# EAGLE board STM32-PROX (EAGLE 6.5.0), part 1 of 2
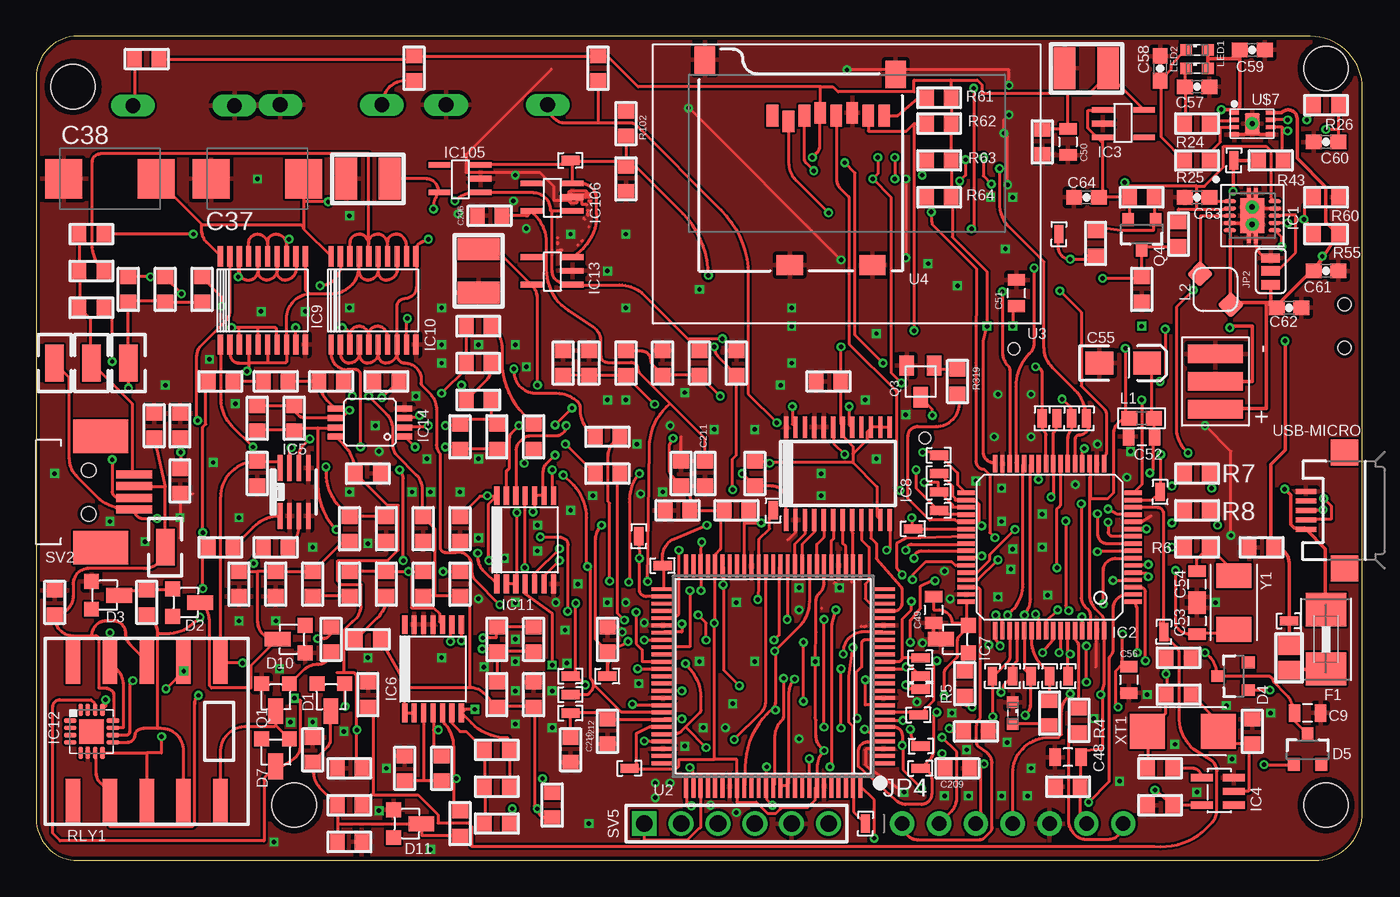
[diagram p0: board, top side]
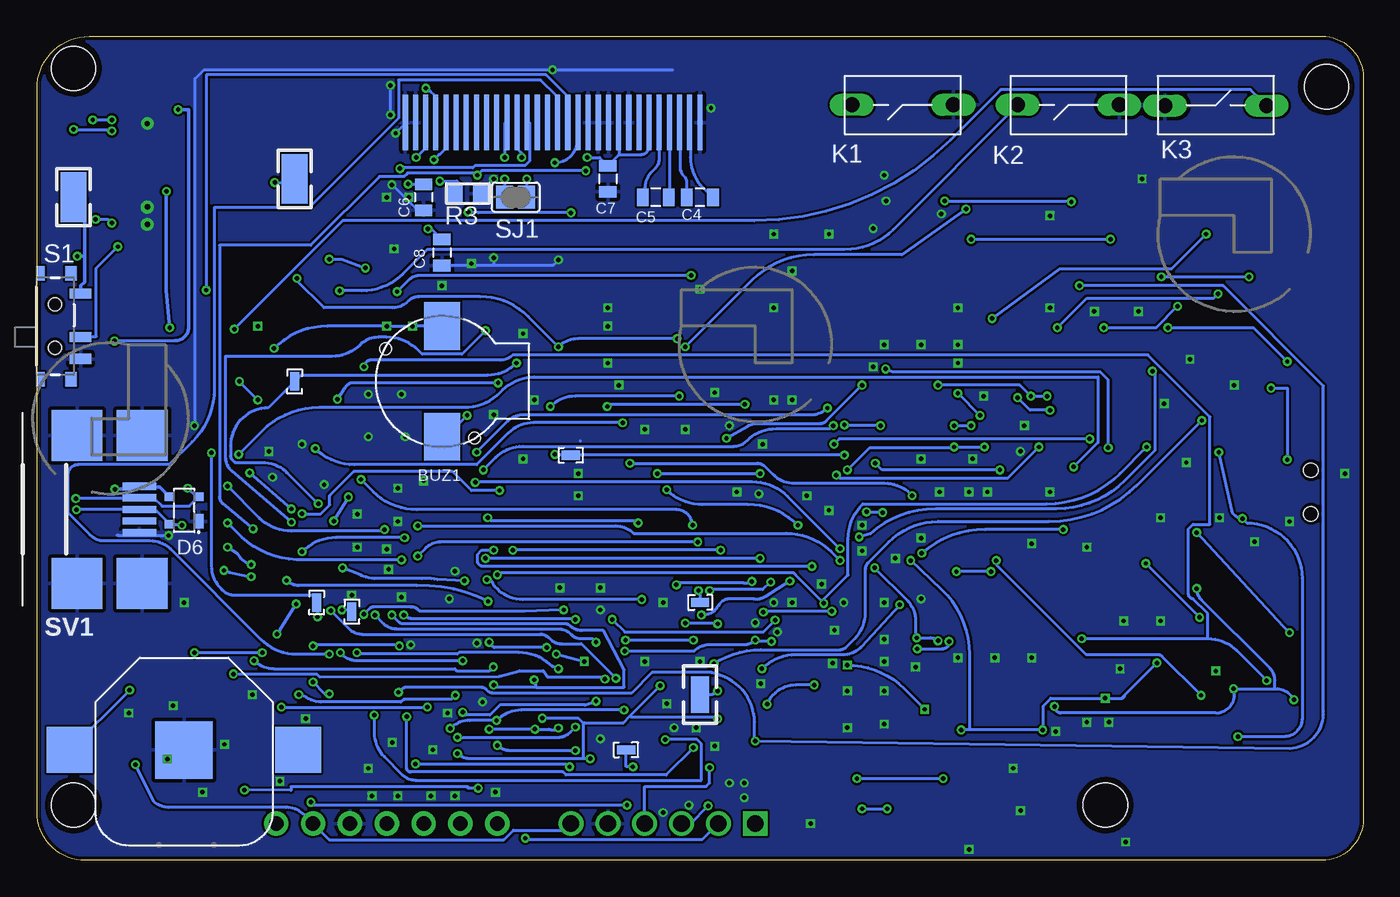
[diagram p1: board, bottom side, seen from below]

Size 91.42 x 56.82 mm. Coordinates in mm from the lower left corner, seen from the top.
Outline: 91.42,3.34 91.42,53.22 arc90 87.81,56.82 2.84,56.82 arc90 0,53.98 0,2.85 arc90 2.85,0 88.08,0 arc90 91.42,3.34
Copper layers (1*16): Top 0.035mm / dielectric 1.5mm / Bottom 0.035mm
Design rules "ITEADstudio_DRC": minimum track width 6mil, minimum drill 12mil, track to track 6mil, track to pad 6mil, pad to pad 6mil, via to via 6mil, smd to smd 0mil, copper to edge 10mil, drill to drill 10mil, minimum pad ring 10mil, minimum via ring 6mil, stop-mask expansion 2mil, vias tented up to drill 100mil, thermal gap 10mil
Net classes: 0 default: width 0.203 mm; 1 adc: width 0.203 mm; 2 power: width 0.254 mm, drill 0.254 mm, clearance 0.203 mm

## Footprints (pad centres in the part's own frame; a part is rotated, then mirrored left to right if it is on the bottom)
NSL_SPARKFUN_BATTCON_12MM = smd 3.962 x 3.962: GND 0,0 | smd 3.175 x 3.175: PWR@1 -7.874,0; PWR@2 7.874,0
BUZZER = smd 3.3 x 2.5: 1 3.81,0; 2 -3.81,0 | hole 0.8: -3.897,-2.25; 2.25,3.897
RLC_0603 = smd 1 x 1.1: 1 -0.85,0; 2 0.85,0
0805 = smd 0.8 x 1.2: 1 -0.9,0; 2 0.9,0
RLC_1210 = smd 1.5 x 2.9: 1 -1.5,0; 2 1.5,0
D/7343-31R = smd 2.55 x 2.7: + 3.175,0; - -3.175,0
EIA3216-KIT = smd 1.9 x 1.6: A 1.65,0; C -1.65,0
SPARKFUN_0603-CAP = smd 1.1 x 1: 1 -0.85,0; 2 0.85,0
SOT23-3LEAD = smd 1.016 x 1.016: 1 -0.94,-0.762; 2 0.965,-0.762 | smd 1.016 x 1.778: 3 0.013,1.143
SOT23-3 = smd 0.8 x 0.9: 1 -0.95,-1; 2 0.95,-1; 3 0,1.1
USBUG_SOT143B = smd 1 x 0.7: 1 -0.75,-1 | smd 0.6 x 0.7: 2 0.95,-1; 3 0.95,1; 4 -0.95,1
1812 = smd 2.286 x 2.794: 1 -2.046,0; 2 2.046,0
QFN-10 = smd 0.28 x 0.85: 1 -1,-1.545; 2 -0.5,-1.545; 3 0,-1.545; 4 0.5,-1.545; 5 1,-1.545; 6 1,1.545; 7 0.5,1.545; 8 0,1.545; 9 -0.5,1.545; 10 -1,1.545 | smd 2.4 x 1.65: P0 0,0 | smd 0.7 x 0.28: P1 -1.55,-0.25; P2 1.55,-0.25; P3 1.55,0.25; P4 -1.55,0.25 | drill 0.381: V0 -0.6,0; V1 0.6,0
LQFP64A_PACKAGE = smd 1.2 x 0.3: 1 -5.75,3.75; 2 -5.75,3.25; 3 -5.75,2.75; 4 -5.75,2.25; 5 -5.75,1.75; 6 -5.75,1.25; 7 -5.75,0.75; 8 -5.75,0.25; 9 -5.75,-0.25; 10 -5.75,-0.75; 11 -5.75,-1.25; 12 -5.75,-1.75; 13 -5.75,-2.25; 14 -5.75,-2.75; 15 -5.75,-3.25; 16 -5.75,-3.75; 33 5.75,-3.75; 34 5.75,-3.25; 35 5.75,-2.75; 36 5.75,-2.25; 37 5.75,-1.75; 38 5.75,-1.25; 39 5.75,-0.75; 40 5.75,-0.25; 41 5.75,0.25; 42 5.75,0.75; 43 5.75,1.25; 44 5.75,1.75; 45 5.75,2.25; 46 5.75,2.75; 47 5.75,3.25; 48 5.75,3.75 | smd 0.3 x 1.2: 17 -3.75,-5.75; 18 -3.25,-5.75; 19 -2.75,-5.75; 20 -2.25,-5.75; 21 -1.75,-5.75; 22 -1.25,-5.75; 23 -0.75,-5.75; 24 -0.25,-5.75; 25 0.25,-5.75; 26 0.75,-5.75; 27 1.25,-5.75; 28 1.75,-5.75; 29 2.25,-5.75; 30 2.75,-5.75; 31 3.25,-5.75; 32 3.75,-5.75; 49 3.75,5.75; 50 3.25,5.75; 51 2.75,5.75; 52 2.25,5.75; 53 1.75,5.75; 54 1.25,5.75; 55 0.75,5.75; 56 0.25,5.75; 57 -0.25,5.75; 58 -0.75,5.75; 59 -1.25,5.75; 60 -1.75,5.75; 61 -2.25,5.75; 62 -2.75,5.75; 63 -3.25,5.75; 64 -3.75,5.75
SOT-23-5 = smd 0.4 x 1.5: 1 -0.94,-1.422; 2 0.01,-1.422; 3 0.96,-1.422; 4 0.96,1.428; 5 -0.94,1.428
SMV-5 = smd 1.5 x 0.5: 1 0,0; 2 0,-0.95; 3 0,-1.9; 4 2.2,-1.9; 5 2.2,0
SOT-23-8-OR-MSOP-8 = smd 0.325 x 1.8: 1 -0.975,-1.65; 2 -0.325,-1.65; 3 0.325,-1.65; 4 0.975,-1.65; 5 0.975,1.65; 6 0.325,1.65; 7 -0.325,1.65; 8 -0.975,1.65
TSSOP-14 = smd 1.3 x 0.36: 1 0,0; 2 0,-0.65; 3 0,-1.3; 4 0,-1.95; 5 0,-2.6; 6 0,-3.25; 7 0,-3.9; 8 6.095,-3.9; 9 6.095,-3.25; 10 6.095,-2.6; 11 6.095,-1.95; 12 6.095,-1.3; 13 6.095,-0.65; 14 6.095,0
TSSOP-24 = smd 0.3 x 1.5: 1 -2.925,-3.2; 2 -2.275,-3.2; 3 -1.625,-3.2; 4 -0.975,-3.2; 5 -0.325,-3.2; 6 0.325,-3.2; 7 0.975,-3.2; 8 1.625,-3.2; 9 2.275,-3.2; 10 2.925,-3.2; 11 3.575,-3.2; 12 4.225,-3.2; 13 4.225,3.2; 14 3.575,3.2; 15 2.925,3.2; 16 2.275,3.2; 17 1.625,3.2; 18 0.975,3.2; 19 0.325,3.2; 20 -0.325,3.2; 21 -0.975,3.2; 22 -1.625,3.2; 23 -2.275,3.2; 24 -2.925,3.2
TSSOP-20 = smd 1.4 x 0.36: 1 0,0; 2 0,-0.65; 3 0,-1.3; 4 0,-1.95; 5 0,-2.6; 6 0,-3.25; 7 0,-3.9; 8 0,-4.55; 9 0,-5.2; 10 0,-5.85; 11 6.095,-5.85; 12 6.095,-5.2; 13 6.095,-4.55; 14 6.095,-3.9; 15 6.095,-3.25; 16 6.095,-2.6; 17 6.095,-1.95; 18 6.095,-1.3; 19 6.095,-0.65; 20 6.095,0
QFN16 = smd 0.85 x 0.3: 1 -1.475,0.75; 2 -1.475,0.25; 3 -1.475,-0.25; 4 -1.475,-0.75; 9 1.475,-0.75; 10 1.475,-0.25; 11 1.475,0.25; 12 1.475,0.75 | smd 0.3 x 0.85: 5 -0.75,-1.475; 6 -0.25,-1.475; 7 0.25,-1.475; 8 0.75,-1.475; 13 0.75,1.475; 14 0.25,1.475; 15 -0.25,1.475; 16 -0.75,1.475 | smd 1.7 x 1.7: TH 0,0
MSOP8 = smd 0.41 x 1.02: 1 0,0; 2 0.65,0; 3 1.3,0; 4 1.95,0; 5 1.95,4.8; 6 1.3,4.8; 7 0.65,4.8; 8 0,4.8
SJ_3 = smd 0.635 x 1.27: 1 -0.889,0; 2 0,0; 3 0.965,0
1X07_ROUND = drill 1 pad 1.676: 1 -7.62,0; 2 -5.08,0; 3 -2.54,0; 4 0,0; 5 2.54,0; 6 5.08,0; 7 7.62,0
B3F-5XX = drill 1.016 long: 1 -3.501,-0.029; 2 3.501,-0.029
0603 = smd 1.1 x 1: 1 -0.85,0; 2 0.85,0
CDRH2D18 = smd 1.3 x 1.3 rotated 225: P$1 -1.061,1.061 | smd 1.3 x 1.3 rotated 315: P$2 1.061,-1.061
LED_SML0603 = smd 0.8 x 0.8: A 0.75,0; C -0.75,0
SOT-23-3 = smd 1 x 1.4: 1 -0.95,-1.1; 2 0.95,-1.1; 3 0,1.1
TQ-SMD-RELAY = smd 1 x 3: 1 -5.08,-4.78; 2 -2.54,-4.78; 3 0,-4.78; 4 2.54,-4.78; 5 5.08,-4.78; 6 5.08,4.78; 7 2.54,4.78; 8 0,4.78; 9 -2.54,4.78; 10 -5.08,4.78
SWITCH-SPST-SMD-A = smd 0.7 x 1.5: 1 -2.25,-1.75; 2 -0.75,-1.75; 3 2.25,-1.75 | smd 1 x 0.6: GND1 -3.65,1; GND3 3.65,1 | smd 1 x 0.8: GND2 -3.65,-1.1; GND4 3.65,-1.1 | hole 0.9: -1.5,0; 1.5,0
SOLDERJUMPER_REFLOW = smd 1.168 x 1.6: 1 -0.762,0; 2 0.762,0
USB-MINIB-SMD = smd 2.3 x 0.5: 1 2,0.4; 2 2,-0.4; 3 2,-1.2; 4 2,-2; 5 2,-2.8 | smd 3.5 x 3.5: TAB0 -2.3,3.9; TAB1 2.2,3.9; TAB2 2.2,-6.3; TAB3 -2.3,-6.3
HIROSE-MQ172-4POS = smd 0.55 x 2.5: 1 -1.2,6.75; 2 -0.4,6.75; 3 0.4,6.75; 4 1.2,6.75 | smd 2.3 x 3.8: P$1 -3.85,4.45; P$2 3.85,4.45 | hole 1: -1.5,3.6; 1.5,3.6
HEADER-MALE-6X1-0.100-UNKEYED = drill 1.143 square: 1 0,6.35 | drill 1.143: 2 0,3.81; 3 0,1.27; 4 0,-1.27; 5 0,-3.81; 6 0,-6.35
SMD-TESTPOINT = smd 1.27 x 0.635: 1 0,0
KEYSTONE-SMD-TESTPOINT-5015 = smd 2.54 x 1.27: 1 0,0
--MERGED_KEYSTONE-SMD-TESTPOINT-5015 = smd 3.429 x 1.778: 1 0,0
RLC_0805 = smd 1.3 x 1.5: 1 -0.85,0; 2 0.85,0
VQ100 = smd 0.27 x 1.6: 1 -6,-7.6; 2 -5.5,-7.6; 3 -5,-7.6; 4 -4.5,-7.6; 5 -4,-7.6; 6 -3.5,-7.6; 7 -3,-7.6; 8 -2.5,-7.6; 9 -2,-7.6; 10 -1.5,-7.6; 11 -1,-7.6; 12 -0.5,-7.6; 13 0,-7.6; 14 0.5,-7.6; 15 1,-7.6; 16 1.5,-7.6; 17 2,-7.6; 18 2.5,-7.6; 19 3,-7.6; 20 3.5,-7.6; 21 4,-7.6; 22 4.5,-7.6; 23 5,-7.6; 24 5.5,-7.6; 25 6,-7.6; 51 6,7.6; 52 5.5,7.6; 53 5,7.6; 54 4.5,7.6; 55 4,7.6; 56 3.5,7.6; 57 3,7.6; 58 2.5,7.6; 59 2,7.6; 60 1.5,7.6; 61 1,7.6; 62 0.5,7.6; 63 0,7.6; 64 -0.5,7.6; 65 -1,7.6; 66 -1.5,7.6; 67 -2,7.6; 68 -2.5,7.6; 69 -3,7.6; 70 -3.5,7.6; 71 -4,7.6; 72 -4.5,7.6; 73 -5,7.6; 74 -5.5,7.6; 75 -6,7.6 | smd 1.6 x 0.27: 26 7.6,-6; 27 7.6,-5.5; 28 7.6,-5; 29 7.6,-4.5; 30 7.6,-4; 31 7.6,-3.5; 32 7.6,-3; 33 7.6,-2.5; 34 7.6,-2; 35 7.6,-1.5; 36 7.6,-1; 37 7.6,-0.5; 38 7.6,0; 39 7.6,0.5; 40 7.6,1; 41 7.6,1.5; 42 7.6,2; 43 7.6,2.5; 44 7.6,3; 45 7.6,3.5; 46 7.6,4; 47 7.6,4.5; 48 7.6,5; 49 7.6,5.5; 50 7.6,6; 76 -7.6,6; 77 -7.6,5.5; 78 -7.6,5; 79 -7.6,4.5; 80 -7.6,4; 81 -7.6,3.5; 82 -7.6,3; 83 -7.6,2.5; 84 -7.6,2; 85 -7.6,1.5; 86 -7.6,1; 87 -7.6,0.5; 88 -7.6,0; 89 -7.6,-0.5; 90 -7.6,-1; 91 -7.6,-1.5; 92 -7.6,-2; 93 -7.6,-2.5; 94 -7.6,-3; 95 -7.6,-3.5; 96 -7.6,-4; 97 -7.6,-4.5; 98 -7.6,-5; 99 -7.6,-5.5; 100 -7.6,-6
MICROBUILDER_UG-2864HSWEG01_0.96IN_WRAPAROUND = smd 0.35 x 3.81 bottom: 1 -10.15,8.96; 2 -9.45,8.96; 3 -8.75,8.96; 4 -8.05,8.96; 5 -7.35,8.96; 6 -6.65,8.96; 7 -5.95,8.96; 8 -5.25,8.96; 9 -4.55,8.96; 10 -3.85,8.96; 11 -3.15,8.96; 12 -2.45,8.96; 13 -1.75,8.96; 14 -1.05,8.96; 15 -0.35,8.96; 16 0.35,8.96; 17 1.05,8.96; 18 1.75,8.96; 19 2.45,8.96; 20 3.15,8.96; 21 3.85,8.96; 22 4.55,8.96; 23 5.25,8.96; 24 5.95,8.96; 25 6.65,8.96; 26 7.35,8.96; 27 8.05,8.96; 28 8.75,8.96; 29 9.45,8.96; 30 10.15,8.96
MICRO-SD-SOCKET-PP = smd 0.8 x 1.5: 1 -8.94,10.7; 2 -7.84,10.3; 3 -6.74,10.7; 4 -5.64,10.9; 5 -4.54,10.7; 6 -3.44,10.9; 7 -2.34,10.7; 8 -1.24,10.7 | smd 1.8 x 1.4: CD1 -2.05,0.4; CD2 -7.75,0.4 | smd 1.4 x 1.9: GND1 -13.6,14.55; GND3 -0.45,13.55
STAND-OFF-TIGHT = hole 3.048: 0,0
UDFN-EP = smd 0.3 x 0.65: 1 -0.75,-1.25; 2 -0.25,-1.25; 3 0.25,-1.25; 4 0.75,-1.25; 5 0.75,1.25; 6 0.25,1.25; 7 -0.25,1.25; 8 -0.75,1.25 | smd 1.45 x 1.05: 9 0,0 | drill 0.356: V1 0,0
BATT = smd 1.27 x 3.81: 1 -1.905,0; 2 0,0; 3 1.905,0
USB-MICROB = smd 0.35 x 1.4: D+ 0,2.65; D- -0.65,2.65; GND 1.3,2.65; ID 0.65,2.65; VBUS -1.3,2.65 | smd 1.8 x 1.9: MT1 -4,0; MT2 4,0
XTAL-SMD-CITIZEN-CS10 = smd 2.4 x 2.4: A -0.2,0; B 4.7,0
CRYSTAL-TXC-7A = smd 1.7 x 2.4: P$1 1.85,0; P$2 -1.85,0

## Placement (x,y rotation side)
BAT1  3V  [NSL_SPARKFUN_BATTCON_12MM]  81.28,7.62 0 bottom
BUZ1  BUZZER  [BUZZER]  63.5,33.02 90 bottom
C1  33nF  [RLC_0603]  84.45,21.59 180 top
C2  22pF  [RLC_0603]  83.82,8.89 90 top
C3  22pF  [RLC_0603]  78.74,13.97 0 top
C4  1uF  [0805]  45.72,45.72 180 bottom
C5  1uF  [0805]  48.77,45.72 180 bottom
C6  4.7uF  [0805]  64.77,45.72 270 bottom
C7  4.7uF  [0805]  52.07,46.99 270 bottom
C8  4.7uF  [0805]  63.5,41.91 270 bottom
C9  100nF  [0805]  87.63,10.16 180 top
C10  100nF  [RLC_0603]  34.29,11.43 90 top
C11  1nF  [RLC_0603]  21.59,1.27 0 top
C12  1nF  [RLC_0603]  29.21,2.54 90 top
C13  dnp  [RLC_0603]  31.75,5.08 0 top
C14  22pF  [RLC_0603]  7.62,17.78 90 top
C15  130pF  [RLC_0603]  13.97,19.05 270 top
C16  1nF  [RLC_0603]  21.59,19.05 90 top
C17  dnp  [RLC_0603]  34.29,15.24 90 top
C18  33nF  [RLC_0603]  38.1,34.29 90 top
C19  33nF  [RLC_0603]  43.18,34.29 90 top
C20  dnp  [RLC_0603]  8.13,29.97 90 top
C21  33nF  [RLC_0603]  21.59,6.35 180 top
C22  33nF  [RLC_0603]  22.86,26.67 0 top
C23  33nF  [RLC_0603]  15.24,26.67 270 top
C24  33nF  [RLC_0603]  29.21,22.86 270 top
C25  33nF  [RLC_0603]  71.12,5.08 180 top
C26  33nF  [RLC_0603]  69.34,49.53 270 top
C27  4.7uF  [RLC_1210]  72.39,54.61 180 top
C28  33nF  [RLC_0603]  44.2,24.13 180 top
C29  33nF  [RLC_0603]  39.37,15.24 90 top
C30  33nF  [RLC_0603]  64.77,8.89 0 top
C31  33nF  [RLC_0603]  48.26,34.29 90 top
C32  33nF  [RLC_0603]  44.45,26.67 90 top
C33  4.7uF  [RLC_1210]  22.86,46.99 180 top
C34  4.7uF  [RLC_1210]  30.48,40.64 270 top
C35  47pF  [RLC_0603]  9.91,29.97 90 top
C36  dnp  [RLC_0603]  9.91,26.16 270 top
C37  100uF  [D/7343-31R]  15.24,46.99 0 top
C38  100uF  [D/7343-31R]  5.08,46.99 0 top
C39  1nF  [RLC_0603]  1.27,17.78 90 top
C40  dnp  [RLC_0603]  31.75,29.21 270 top
C41  dnp  [RLC_0603]  17.78,30.48 270 top
C42  1nF  [RLC_0603]  34.29,29.21 90 top
C43  1nF  [RLC_0603]  12.7,33.02 0 top
C44  33nF  [RLC_0603]  54.61,33.02 180 top
C45  100nF  [RLC_0603]  26.67,22.86 270 top
C46  33nF  [RLC_0603]  76.2,39.37 270 top
C47  33nF  [RLC_0603]  77.47,3.81 180 top
C48  100nF  [0805]  71.12,7.11 180 top
C49  100nF  [0805]  61.85,17.27 270 top
C50  100nF  [0805]  71.12,49.53 270 top
C51  100nF  [0805]  67.56,39.12 90 top
C52  100nF  [0805]  76.2,29.21 180 top
C53  12pF  [0805]  80.01,16.51 270 top
C54  12pF  [0805]  80.01,19.05 90 top
C55  10uF  [EIA3216-KIT]  74.93,34.29 0 top
C56  100nF  [0805]  75.31,12.45 270 top
C57  100nF  [SPARKFUN_0603-CAP]  80.01,53.34 0 top
C58  100nF  [SPARKFUN_0603-CAP]  77.47,54.61 90 top
C59  1uF  [SPARKFUN_0603-CAP]  83.82,55.88 0 top
C60  100nF  [SPARKFUN_0603-CAP]  88.9,49.53 180 top
C61  1uF  [SPARKFUN_0603-CAP]  88.9,40.64 0 top
C62  10uF  [SPARKFUN_0603-CAP]  86.36,38.1 0 top
C63  100nF  [SPARKFUN_0603-CAP]  80.01,45.72 180 top
C64  10uF  [SPARKFUN_0603-CAP]  72.39,45.72 180 top
C206  4.7uF  [RLC_0603]  31.24,44.45 180 top
C209  100nF  [RLC_0603]  63.5,6.35 0 top
C210  100nF  [RLC_0603]  36.83,7.62 270 top
C211  100nF  [RLC_0603]  46.1,26.67 270 top
C212  100nF  [RLC_0603]  39.37,8.89 270 top
D1  DIODE-SMD-SOT23  [SOT23-3LEAD]  20.32,11.43 180 top
D2  DIODE-SMD-SOT23  [SOT23-3LEAD]  10.16,17.78 270 top
D3  DIODE-SMD-SOT23  [SOT23-3LEAD]  4.57,18.29 270 top
D4  PMEG4005ET  [SOT23-3]  82.55,12.7 90 top
D5  PMEG4005ET  [SOT23-3]  87.63,7.62 0 top
D6  USBUG_PRTR5V0U2X  [USBUG_SOT143B]  81.28,24.13 90 bottom
D7  DIODE-SMD-SOT23  [SOT23-3LEAD]  16.51,7.62 180 top
D10  DIODE-SMD-SOT23  [SOT23-3LEAD]  17.78,15.24 90 top
D11  DIODE-SMD-SOT23  [SOT23-3LEAD]  25.4,2.54 270 top
F1  [1812]  88.9,15.24 90 top
IC1  [QFN-10]  83.82,44.45 270 top
IC2  STM32F103RET6  [LQFP64A_PACKAGE]  69.85,21.59 180 top
IC3  PQ1X331M2ZP-3V3-LDO-SOT-23-5  [SOT-23-5]  74.93,50.8 270 top
IC4  HCU-INVERTER  [SMV-5]  82.55,3.81 180 top
IC5  TLV3502  [SOT-23-8-OR-MSOP-8]  17.78,25.4 0 top
IC6  MCP6294  [TSSOP-14]  25.4,10.16 90 top
IC7  MCP100  [SOT23-3LEAD]  63.5,15.24 90 top
IC8  TLC5540  [TSSOP-24]  54.61,26.67 0 top
IC9  74XX244  [TSSOP-20]  12.7,35.56 90 top
IC10  74XX244  [TSSOP-20]  20.32,35.56 90 top
IC11  CD4066  [TSSOP-14]  31.75,19.05 90 top
IC12  NLAST44599MNG  [QFN16]  3.81,8.89 0 top
IC13  PQ1X331M2ZP-3V3-LDO-SOT-23-5  [SOT-23-5]  35.56,40.64 90 top
IC14  AD8052  [MSOP8]  25.4,29.21 90 top
IC105  MCP1824T-250  [SOT-23-5]  29.21,46.99 90 top
IC106  MCP1824T-120  [SOT-23-5]  35.56,45.72 90 top
JP2  JUMPER-3SMD  [SJ_3]  85.09,40.64 270 top
JP4  [1X07_ROUND]  67.31,2.54 0 top
K1  [B3F-5XX]  31.75,52.07 180 bottom
K2  [B3F-5XX]  20.32,52.07 180 bottom
K3  [B3F-5XX]  10.16,52.07 0 bottom
L1  [0603]  76.2,30.48 0 top
L2  CDRH2D18/HPNP-2R2NC  [CDRH2D18]  81.28,39.37 180 top
LED1  [LED_SML0603]  80.01,55.88 0 top
LED2  [LED_SML0603]  80.01,54.61 0 top
LED3  [LED_SML0603]  67.31,10.16 270 top
Q1  NPN-SOT23-2N3904  [SOT23-3LEAD]  16.51,11.43 180 top
Q3  MMBT2222  [SOT-23-3]  60.96,33.02 180 top
Q4  MOSFET-PCHANNELSMD  [SOT23-3]  76.2,43.18 180 top
R1  1M  [RLC_0603]  78.74,11.43 180 top
R2  100  [RLC_0603]  77.47,6.35 180 top
R3  820K  [RLC_0603]  61.72,45.97 180 bottom
R4  10K  [RLC_0603]  71.88,9.65 90 top
R5  10K  [RLC_0603]  64.01,12.19 270 top
R6  390  [RLC_0603]  80.01,21.59 180 top
R7  27  [RLC_0603]  80.01,26.67 180 top
R8  27  [RLC_0603]  80.01,24.13 180 top
R9  100K  [RLC_0603]  27.94,6.35 90 top
R10  100K  [RLC_0603]  25.4,6.35 270 top
R11  510K  [RLC_0603]  19.05,7.62 270 top
R12  100K  [RLC_0603]  35.56,3.81 90 top
R13  10K  [RLC_0603]  31.75,2.54 180 top
R14  10K  [RLC_0603]  31.75,7.62 0 top
R15  10K  [RLC_0603]  16.51,19.05 90 top
R16  zerohm  [RLC_0603]  19.05,19.05 270 top
R17  10K  [RLC_0603]  26.67,19.05 90 top
R18  10K  [RLC_0603]  31.75,15.24 90 top
R19  10K  [RLC_0603]  31.75,11.43 90 top
R20  240K  [RLC_0603]  12.7,21.59 0 top
R21  24K  [RLC_0603]  16.51,21.59 0 top
R22  33  [RLC_0603]  3.81,38.1 180 top
R23  1K  [RLC_0603]  40.64,46.99 90 top
R24  [RLC_0603]  80.01,50.8 0 top
R25  [RLC_0603]  80.01,48.26 0 top
R26  215.9K  [RLC_0603]  88.9,52.07 0 top
R27  33  [RLC_0603]  6.35,39.37 270 top
R28  33  [RLC_0603]  3.81,40.64 180 top
R29  33  [RLC_0603]  8.89,39.37 270 top
R30  10M  [RLC_0603]  21.59,3.81 0 top
R31  240K  [RLC_0603]  22.86,11.43 270 top
R32  zerohm  [RLC_0603]  16.51,33.02 0 top
R33  2.4K  [RLC_0603]  29.21,29.21 270 top
R34  10K  [RLC_0603]  15.24,30.48 270 top
R35  zerohm  [RLC_0603]  30.48,36.83 180 top
R36  dnp  [RLC_0603]  29.21,19.05 90 top
R37  dnp  [RLC_0603]  24.13,19.05 90 top
R38  dnp  [RLC_0603]  22.86,15.24 180 top
R39  1K  [RLC_0603]  39.37,29.21 0 top
R40  10K  [RLC_0603]  20.32,15.24 270 top
R41  10M  [RLC_0603]  21.59,22.86 90 top
R42  1M  [RLC_0603]  24.13,22.86 90 top
R43  74.74K  [RLC_0603]  85.09,48.26 0 top
R44  1K  [RLC_0603]  39.37,26.67 0 top
R45  10K  [RLC_0603]  11.43,39.37 270 top
R46  10K  [RLC_0603]  3.81,43.18 180 top
R47  10K  [RLC_0603]  49.53,26.67 270 top
R48  dnp  [RLC_0603]  20.32,33.02 180 top
R49  2.4K  [RLC_0603]  30.48,34.29 180 top
R50  10K  [RLC_0603]  24.13,33.02 0 top
R51  2.4K  [RLC_0603]  30.48,31.75 0 top
R52  100  [RLC_0603]  45.72,34.29 90 top
R53  330  [RLC_0603]  40.64,34.29 90 top
R54  100  [RLC_0603]  36.32,34.29 270 top
R55  1.5M  [RLC_0603]  88.9,43.18 0 top
R56  10K  [RLC_0603]  76.2,45.72 180 top
R57  10K  [RLC_0603]  73.02,42.55 90 top
R58  dnp  [RLC_0603]  78.74,43.18 90 top
R59  3.3K  [RLC_0603]  48.26,24.13 180 top
R60  150K 1%  [RLC_0603]  88.9,45.72 180 top
R61  10K  [RLC_0603]  62.23,52.58 0 top
R62  10K  [RLC_0603]  62.23,50.8 0 top
R63  10K  [RLC_0603]  62.23,48.26 0 top
R64  10K  [RLC_0603]  62.23,45.72 0 top
R65  330  [RLC_0603]  69.85,10.16 270 top
R69  10K  [RLC_0603]  7.62,55.25 0 top
R70  10K  [RLC_0603]  26.03,54.61 90 top
R71  10K  [RLC_0603]  38.73,54.61 90 top
R102  10K  [RLC_0603]  40.64,50.8 90 top
R319  100  [RLC_0603]  63.5,33.02 270 top
RLY1  RELAY-DPDT  [TQ-SMD-RELAY]  7.62,8.89 180 top
S1  [SWITCH-SPST-SMD-A]  90.17,36.83 90 bottom
SJ1  [SOLDERJUMPER_REFLOW]  58.42,45.72 180 bottom
SV1  USB-MINIB  [USB-MINIB-SMD]  86.36,25.4 0 bottom
SV2  HIROSE-MQ172-4POS  [HIROSE-MQ172-4POS]  0,25.4 270 top
SV5  HEADER-MALE-6X1  [HEADER-MALE-6X1-0.100-UNKEYED]  48.26,2.54 90 top
TP1  TESTPAD  [SMD-TESTPOINT]  54.61,27.94 180 bottom
TP2  TESTPADKEYSTONE-SMD  [KEYSTONE-SMD-TESTPOINT-5015]  8.89,21.59 270 top
TP3  TESTPADKEYSTONE-SMD  [KEYSTONE-SMD-TESTPOINT-5015]  1.27,34.29 90 top
TP4  TESTPADKEYSTONE-SMD  [KEYSTONE-SMD-TESTPOINT-5015]  6.35,34.29 270 top
TP5  TESTPADKEYSTONE-SMD  [KEYSTONE-SMD-TESTPOINT-5015]  3.81,34.29 90 top
TP7  TESTPADKEYSTONE-SMD  [KEYSTONE-SMD-TESTPOINT-5015]  45.72,11.43 270 bottom
TP8  TESTPADKEYSTONE-SMD  [SMD-TESTPOINT]  86.36,16.51 180 top
TP9  TESTPADKEYSTONE-SMD  [--MERGED_KEYSTONE-SMD-TESTPOINT-5015]  88.9,45.72 90 bottom
TP10  TESTPADKEYSTONE-SMD  [--MERGED_KEYSTONE-SMD-TESTPOINT-5015]  73.66,46.99 90 bottom
TP11  TESTPAD  [SMD-TESTPOINT]  69.72,17.14 270 bottom
TP16  TESTPAD  [SMD-TESTPOINT]  82.55,48.26 90 top
TP18  TESTPAD  [SMD-TESTPOINT]  40.89,6.35 180 top
TP19  TESTPAD  [SMD-TESTPOINT]  39.37,12.7 180 top
TP20  TESTPAD  [SMD-TESTPOINT]  36.83,10.16 180 top
TP22  TESTPAD  [SMD-TESTPOINT]  36.83,48.26 180 top
TP23  TESTPAD  [SMD-TESTPOINT]  70.48,43.18 90 top
TP24  TESTPAD  [SMD-TESTPOINT]  57.15,2.54 270 top
TP25  TESTPAD  [SMD-TESTPOINT]  41.53,22.35 270 top
TP26  TESTPAD  [SMD-TESTPOINT]  45.72,17.78 0 bottom
TP27  TESTPAD  [SMD-TESTPOINT]  50.8,24.13 90 top
TP28  TESTPAD  [SMD-TESTPOINT]  73.66,33.02 270 bottom
TP29  TESTPAD  [SMD-TESTPOINT]  72.14,17.78 270 bottom
TP30  TESTPAD  [SMD-TESTPOINT]  71.12,12.7 90 top
TP31  TESTPAD  [SMD-TESTPOINT]  60.83,10.03 180 top
TP32  TESTPAD  [SMD-TESTPOINT]  60.96,7.87 0 top
TP33  TESTPAD  [SMD-TESTPOINT]  60.96,11.81 180 top
TP34  TESTPAD  [SMD-TESTPOINT]  60.96,6.35 180 top
TP35  TESTPAD  [SMD-TESTPOINT]  43.18,20.32 180 top
TP36  TESTPAD  [SMD-TESTPOINT]  69.85,12.7 90 top
TP37  TESTPAD  [SMD-TESTPOINT]  60.96,13.97 180 top
TP38  TESTPAD  [SMD-TESTPOINT]  60.96,12.7 180 top
TP39  TESTPAD  [SMD-TESTPOINT]  68.58,12.7 90 top
TP40  TESTPAD  [SMD-TESTPOINT]  50.8,7.62 180 bottom
TP41  TESTPAD  [SMD-TESTPOINT]  67.31,12.7 90 top
TP42  TESTPAD  [SMD-TESTPOINT]  65.91,12.7 90 top
TP43  TESTPAD  [SMD-TESTPOINT]  36.83,11.43 180 top
TP44  TESTPAD  [SMD-TESTPOINT]  36.83,12.7 180 top
TP45  TESTPAD  [SMD-TESTPOINT]  60.45,22.86 180 top
TP46  TESTPAD  [SMD-TESTPOINT]  69.34,30.48 270 top
TP47  TESTPAD  [SMD-TESTPOINT]  70.36,30.48 270 top
TP48  TESTPAD  [SMD-TESTPOINT]  62.23,24.13 180 top
TP49  TESTPAD  [SMD-TESTPOINT]  62.23,25.4 180 top
TP50  TESTPAD  [SMD-TESTPOINT]  62.23,26.67 180 top
TP51  TESTPAD  [SMD-TESTPOINT]  62.23,27.94 180 top
TP52  TESTPAD  [SMD-TESTPOINT]  77.72,15.75 270 top
TP53  TESTPAD  [SMD-TESTPOINT]  77.47,25.4 270 top
TP54  TESTPAD  [SMD-TESTPOINT]  72.39,30.48 270 top
TP55  TESTPAD  [SMD-TESTPOINT]  71.37,30.48 270 top
U1  FERRITE0805  [RLC_0805]  86.36,13.97 90 top
U2  XC3S50  [VQ100]  50.8,12.7 90 top
U3  UG-2864HSWEG01  [MICROBUILDER_UG-2864HSWEG01_0.96IN_WRAPAROUND]  55.88,41.91 0 top
U4  SDCARD  [MICRO-SD-SOCKET-PP]  59.69,40.64 0 top
U$1  [STAND-OFF-TIGHT]  17.78,3.81 0 top
U$2  [STAND-OFF-TIGHT]  2.54,53.34 0 top
U$4  [STAND-OFF-TIGHT]  88.9,54.61 0 top
U$6  [STAND-OFF-TIGHT]  88.9,3.81 0 top
U$7  MC34674  [UDFN-EP]  83.82,50.8 270 top
U$9  BATT  [BATT]  81.28,33.02 270 top
U$11  [L1LOGO]  86.36,30.48 0 top
U$12  [L1LOGO]  8.89,43.18 270 top
U$13  [L1LOGO]  41.91,35.56 270 top
USB-MICRO  USB-MICROB  [USB-MICROB]  90.17,24.13 90 top
XT1  XTAL-SMD-CITIZEN-CS10  [XTAL-SMD-CITIZEN-CS10]  81.28,8.89 180 top
Y1  8Mhz  [CRYSTAL-TXC-7A]  82.55,17.78 270 top

## Library data of the parts
BAT1 = STM32-PROX; DIGIKEY: BK-885CT-ND; MPN: BK-885-TR; OC_NEWARK: unknown; PARTNO: BK-885-TR
BUZ1 = STM32-PROX; DIGIKEY: 102-1265-1-ND; MF: CCV-084B16; MPN: CCV-084B16; OC_NEWARK: unknown; PARTNO: CCV-084B16
C1 C18 C19 C21-C26 C28-C32 C44 C46 C47 = STM32-PROX; DIGIKEY: 311-1429-1-ND; MPN: CC0603KRX7R9BB333; OC_NEWARK: unknown; PARTNO: CC0603KRX7R9BB333
C2 C3 C14 = STM32-PROX; DIGIKEY: 445-1273-1-ND; MPN: C1608C0G1H220J080AA; OC_NEWARK: unknown; PARTNO: C1608C0G1H220J080AA
C4 C5 = STM32-PROX; DIGIKEY: 311-1358-1-ND; MPN: CC0805ZRY5V8BB105; OC_NEWARK: unknown; PARTNO: CC0805ZRY5V8BB105
C6-C8 = STM32-PROX; DIGIKEY: 1276-1065-1-ND; MPN: CL21A475KOFNNNE; OC_NEWARK: unknown; PARTNO: CL21A475KOFNNNE
C9 C48-C52 C56 = STM32-PROX; DIGIKEY: 1276-1007-1-ND; MPN: CL21F104ZBCNNNC; OC_NEWARK: unknown; PARTNO: CL21F104ZBCNNNC
C10 C45 C209-C212 = STM32-PROX; DIGIKEY: 1276-1005-1-ND; MPN: CL10B104KO8NNNC; OC_NEWARK: unknown; PARTNO: CL10B104KO8NNNC
C11 C12 C16 C39 C42 C43 = STM32-PROX; DIGIKEY: 490-1494-2-ND; MPN: GRM188R71H102KA01D; OC_NEWARK: unknown; PARTNO: GRM188R71H102KA01D
C13 C17 C20 C36 C40 C41 D10 D11 L2 R16 R24 R25 R32 R35-R38 R48 R58 RLY1 SV1 SV5 TP1-TP5 TP7 U3 U4 = STM32-PROX; OC_NEWARK: unknown; PARTNO: *
C15 = STM32-PROX; DIGIKEY: 490-1430-1-ND; MPN: GRM1885C1H131JA01D; OC_NEWARK: unknown; PARTNO: GRM1885C1H131JA01D
C27 C33 C34 = STM32-PROX; DIGIKEY: 1276-1856-1-ND; MPN: CL32B475KOINNNE; OC_NEWARK: unknown; PARTNO: CL32B475KOINNNE
C35 = STM32-PROX; DIGIKEY: 1276-1037-1-ND; MPN: CL10C470JB8NNNC; OC_NEWARK: unknown; PARTNO: CL10C470JB8NNNC
C37 C38 = STM32-PROX; DIGIKEY: 399-3769-1-ND; MPN: T491D107K010AT; OC_NEWARK: unknown; PARTNO: T491D107K010AT
C53 C54 = STM32-PROX; DIGIKEY: 1276-1120-1-ND; MPN: CL21C120JBANNNC; OC_NEWARK: unknown; PARTNO: CL21C120JBANNNC
C55 = STM32-PROX; DIGIKEY: 478-1656-1-ND; MF: TAJA106M006RNJ; MPN: TAJA106M006RNJ; OC_NEWARK: unknown; PARTNO: TAJA106M006RNJ
C57 C58 C60 C63 = STM32-PROX; DIGIKEY: 1276-1005-1-ND; MPN: CL10B104KO8NNNC; OC_NEWARK: 85K9474; PARTNO: CL10B104KO8NNNC
C59 C61 = STM32-PROX; DIGIKEY: 311-1372-1-ND; MPN: CC0603ZRY5V7BB105; OC_NEWARK: 06R5073; PARTNO: CC0603ZRY5V7BB105
C62 C64 = STM32-PROX; DIGIKEY: 445-9065-1-ND; DIGIKEY_ALT: 587-3238-1-ND; MPN: C1608X5R1C106M080AB; OC_NEWARK: unknown; PARTNO: C1608X5R1C106M080AB
C206 = STM32-PROX; DIGIKEY: 1276-1784-1-ND; MPN: EMK107ABJ475KA-T; OC_NEWARK: unknown; PARTNO: EMK107ABJ475KA-T
D1-D3 = STM32-PROX; DIGIKEY: BAS21INCT-ND; MF: BAS 21 E6327; MPN: BAS 21 E6327; OC_NEWARK: unknown; PARTNO: BAS 21 E6327
D4 D5 = STM32-PROX; DIGIKEY: 568-4134-1-ND; MPN: PMEG4005ET,215; OC_NEWARK: unknown; PARTNO: PMEG4005ET,215
D6 = badge.lbrbadge_2013
D7 = STM32-PROX; DIGIKEY: BZX84C47-FDICT-ND; OC_NEWARK: unknown; PARTNO: *
F1 = STM32-PROX; DIGIKEY: MICROSMD050FCT-ND; MPN: MICROSMD050F-2; OC_NEWARK: unknown; PARTNO: MICROSMD050F-2
IC1 = STM32-PROX; DIGIKEY: 296-21685-1-ND; MPN: TPS61202DRCT; OC_NEWARK: unknown; PARTNO: TPS61202DRCT
IC2 = STM32-PROX; DIGIKEY: 497-6444-ND; MPN: STM32F103RET6; OC_NEWARK: unknown; PARTNO: STM32F103RET6
IC3 = STM32-PROX; DIGIKEY: 296-18476-1-ND; MPN: LP2985-33DBVR; OC_NEWARK: unknown; PARTNO: LP2985-33DBVR
IC4 = STM32-PROX; DIGIKEY: NC7SZ04M5XCT-ND; MF: NC7SZ04M5X; OC_NEWARK: unknown; PARTNO: *
IC5 = STM32-PROX; DIGIKEY: 296-18147-1-ND; MPN: TLV3502AIDCNT; OC_NEWARK: unknown; PARTNO: TLV3502AIDCNT
IC6 = STM32-PROX; DIGIKEY: MCP6294-E/ST-ND; MPN: MCP6294-E/ST; OC_NEWARK: unknown; PARTNO: MCP6294-E/ST
IC7 = STM32-PROX; DIGIKEY: MCP100T-270I/TTCT-ND; MPN: MCP100T-270I/TT; OC_NEWARK: unknown; PARTNO: MCP100T-270I/TT
IC8 = STM32-PROX; DIGIKEY: 296-2184-5-ND; MPN: TLC5540IPW; OC_NEWARK: unknown; PARTNO: TLC5540IPW
IC9 IC10 = STM32-PROX; DIGIKEY: 497-2913-1-ND; MF: 74AC244TTR; MPN: 74AC244TTR; OC_NEWARK: unknown; PARTNO: 74AC244TTR
IC11 = STM32-PROX; DIGIKEY: 296-14123-1-ND; MPN: CD4066BPWR; OC_NEWARK: unknown; PARTNO: CD4066BPWR
IC12 = STM32-PROX; AVNET: NLAST44599MNR2G; DIGIKEY: NLAST44599MNR2GOSCT-ND; MF: NLAST44599MNG; MPN: NLAST44599MNG; OC_NEWARK: unknown; PARTNO: NLAST44599MNG
IC13 = STM32-PROX; DIGIKEY: 296-18476-2-ND; MPN: LP2985-33DBVR; OC_NEWARK: unknown; PARTNO: LP2985-33DBVR
IC14 = STM32-PROX; DIGIKEY: AD8052ARMZ-ND; MPN: AD8052ARMZ; OC_NEWARK: unknown; PARTNO: AD8052ARMZ
IC105 = STM32-PROX; DIGIKEY: MCP1824T-2502E/OTCT-ND; MPN: MCP1824T-2502E/OT; OC_NEWARK: unknown; PARTNO: MCP1824T-2502E/OT
IC106 = STM32-PROX; DIGIKEY: MCP1824T-1202E/OTCT-ND; MPN: MCP1824T-1202E/OT; OC_NEWARK: unknown; PARTNO: MCP1824T-1202E/OT
JP2 = SparkFun-Passives; MPN: NONE; OC_NEWARK: unknown; PARTNO: NONE
JP4 = microbuilder
K1-K3 = STM32-PROX; DIGIKEY: CKN9102-ND; MF: PTS635SL50 LFS; MPN: PTS635SL50 LFS; OC_NEWARK: unknown; PARTNO: PTS635SL50 LFS
L1 SJ1 TP8-TP10 = STM32-PROX; MPN: NONE; OC_NEWARK: unknown; PARTNO: NONE
LED1 = STM32-PROX; DIGIKEY: 475-1409-1-ND; MF: LG Q971-KN-1; OC_NEWARK: unknown; PARTNO: *
LED2 = STM32-PROX; DIGIKEY: 475-3016-1-ND; MF: LS Q971-KN-1; OC_NEWARK: unknown; PARTNO: *
LED3 = STM32-PROX; DIGIKEY: 475-2558-1-ND; MF: LY Q976-P1S2-36; OC_NEWARK: unknown; PARTNO: *
Q1 = STM32-PROX; DIGIKEY: 568-1741-1-ND; MF: PMBT3904,215; MPN: PMBT3904,215; OC_NEWARK: unknown; PARTNO: PMBT3904,215
Q3 = STM32-PROX; MPN: MMBT2222A-7-F; OC_NEWARK: unknown; PARTNO: MMBT2222A-7-F
Q4 = STM32-PROX; DIGIKEY: SI2303CDS-T1-GE3CT-ND; MF: SI2303CDS-T1-GE3; MPN: SI2303CDS-T1-GE3; OC_NEWARK: unknown; PARTNO: SI2303CDS-T1-GE3
R1 R42 = STM32-PROX; DIGIKEY: 311-1.0MGRTR-ND; MPN: RC0603JR-071ML; OC_NEWARK: unknown; PARTNO: RC0603JR-071ML
R2 R52 R54 R319 = STM32-PROX; DIGIKEY: RMCF0603JT100RCT-ND; MPN: RMCF0603JT100R; OC_NEWARK: unknown; PARTNO: RMCF0603JT100R
R3 = STM32-PROX; DIGIKEY: 311-820KGRTR-ND; MPN: RC0603JR-07820KL; OC_NEWARK: unknown; PARTNO: RC0603JR-07820KL
R4 R5 R13-R15 R17-R19 R34 R40 R45-R47 R50 R56 R57 R61-R64 R69-R71 R102 = STM32-PROX; DIGIKEY: RMCF0603JT10K0CT-ND; MPN: RMCF0603JT10K0; OC_NEWARK: unknown; PARTNO: RMCF0603JT10K0
R6 = STM32-PROX; DIGIKEY: RMCF0603JT390RCT-ND; MPN: RMCF0603JT390R; OC_NEWARK: unknown; PARTNO: RMCF0603JT390R
R7 R8 = STM32-PROX; DIGIKEY: RMCF0603JT27R0CT-ND; MPN: RMCF0603JT27R0; OC_NEWARK: unknown; PARTNO: RMCF0603JT27R0
R9 R10 R12 = STM32-PROX; DIGIKEY: 311-100KGRTR-ND; MPN: RC0603JR-07100KL; OC_NEWARK: unknown; PARTNO: RC0603JR-07100KL
R11 = STM32-PROX; DIGIKEY: P510KGTR-ND; MPN: ERJ-3GEYJ514V; OC_NEWARK: unknown; PARTNO: ERJ-3GEYJ514V
R20 R31 = STM32-PROX; DIGIKEY: 1276-5119-2-ND; MPN: RC1608J244CS; OC_NEWARK: unknown; PARTNO: RC1608J244CS
R21 = STM32-PROX; DIGIKEY: 311-24KGRTR-ND; MPN: RC0603JR-0724KL; OC_NEWARK: unknown; PARTNO: RC0603JR-0724KL
R22 R27-R29 = STM32-PROX; DIGIKEY: 311-33GRTR-ND; MPN: RC0603JR-0733RL; OC_NEWARK: unknown; PARTNO: RC0603JR-0733RL
R23 R39 R44 = STM32-PROX; DIGIKEY: RMCF0603JT1K00CT-ND; MPN: RMCF0603JT1K00; OC_NEWARK: unknown; PARTNO: RMCF0603JT1K00
R26 = STM32-PROX; DIGIKEY: 541-215KHCT-ND; MPN: CRCW0603215KFKEA; OC_NEWARK: unknown; PARTNO: CRCW0603215KFKEA
R30 R41 = STM32-PROX; DIGIKEY: 311-10MGRTR-ND; MPN: RC0603JR-0710ML; OC_NEWARK: unknown; PARTNO: RC0603JR-0710ML
R33 R49 R51 = STM32-PROX; DIGIKEY: 311-2.40KHRTR-ND; MPN: RC0603FR-072K4L; OC_NEWARK: unknown; PARTNO: RC0603FR-072K4L
R43 = STM32-PROX; DIGIKEY: RMCF0603JT75K0CT-ND; MPN: RMCF0603JT75K0; OC_NEWARK: unknown; PARTNO: RMCF0603JT75K0
R53 R65 = STM32-PROX; DIGIKEY: RMCF0603JT330RCT-ND; MPN: RMCF0603JT330R; OC_NEWARK: unknown; PARTNO: RMCF0603JT330R
R55 = STM32-PROX; DIGIKEY: RHM1.5MDCT-ND; MPN: ESR03EZPJ155; OC_NEWARK: unknown; PARTNO: ESR03EZPJ155; TOLERANCE: 5%
R59 = STM32-PROX; DIGIKEY: RMCF0603JT3K30CT-ND; MPN: RMCF0603JT3K30; OC_NEWARK: unknown; PARTNO: RMCF0603JT3K30
R60 = STM32-PROX; DIGIKEY: RHM150KADCT-ND; MPN: ESR03EZPF1503; OC_NEWARK: unknown; PARTNO: ESR03EZPF1503; TOLERANCE: 1%
S1 = SparkFun-Electromechanical; OC_NEWARK: unknown; PARTNO: *
SV2 = STM32-PROX; DIGIKEY: H10488CT-ND; MF: MQ172X-4PA(66); OC_NEWARK: unknown; PARTNO: *
TP11 TP16 TP18-TP20 TP22-TP55 U$1 U$2 U$4 U$6 U$11-U$13 = STM32-PROX
U1 = STM32-PROX; DIGIKEY: 445-1566-1-ND; MF: MPZ2012S300A; MPN: MPZ2012S300A; OC_NEWARK: unknown; PARTNO: MPZ2012S300A
U2 = STM32-PROX; MPN: XC3S50-5VQ100C (not on bom); OC_NEWARK: unknown; PARTNO: XC3S50-5VQ100C (not on bom)
U$7 = STM32-PROX; DIGIKEY: MC34674AEPR2TR-ND; MF: MC34674AEPR2; MOUSER: 841-MC34674AEPR2; MPN: MC34674AEPR2; OC_NEWARK: unknown; PARTNO: MC34674AEPR2
U$9 = STM32-PROX; DIGIKEY: MC34674AEPR2TR-ND; MF: MC34674AEPR2; MPN: MC34674AEPR2; OC_NEWARK: unknown; PARTNO: MC34674AEPR2
USB-MICRO = STM32-PROX; DIGIKEY: A97800CT-ND; MF: 1981568-1; MPN: 1981568-1; OC_NEWARK: unknown; PARTNO: 1981568-1
XT1 = STM32-PROX; DIGIKEY: 535-9101-1-ND; MF: ABM3-13.560MHZ-B2-T; MPN: ABM3-13.560MHZ-B2-T; OC_NEWARK: unknown; PARTNO: ABM3-13.560MHZ-B2-T
Y1 = STM32-PROX; DIGIKEY: 887-1740-1-ND; MPN: 7A-8.000MAAE-T; OC_NEWARK: unknown; PARTDB: 7A-8.000MAAE-T; PARTNO: 7A-8.000MAAE-T

## Nets
5V: C64.1 IC1.2 IC1.10 IC3.1 IC3.3 Q4.2 R56.2 R58.2 TP10.1
1356_CRYSTAL: C3.1 R1.2 R2.2 U2.89 U2.90 XT1.B
!CS: IC2.62 TP28.1 U3.13
!RES: IC2.61 TP29.1 U3.14
!SD_CS: IC2.8 R64.1 U4.2
+1V2: C206.1 C209.1 C210.1 C211.1 C212.1 IC106.5 TP20.1 U2.18 U2.45 U2.69 U2.93
+2V5: C29.1 C30.1 C31.1 C33.1 IC105.5 TP19.1 U2.7 U2.33 U2.58 U2.84
+3V3-FPGA: C28.1 C32.1 C34.1 C47.1 IC4.5 IC13.5 R59.2 TP18.1 U2.6 U2.19 U2.31 U2.46 U2.57 U2.70 U2.83 U2.94
ADC1 [adc]: IC8.3 U2.35
ADC2 [adc]: IC8.4 U2.34
ADC3 [adc]: IC8.5 U2.32
ADC4 [adc]: IC8.6 U2.30
ADC5 [adc]: IC8.7 U2.28
ADC6 [adc]: IC8.8 U2.27
ADC7 [adc]: IC8.9 U2.23
ADC8 [adc]: IC8.10 U2.22
ADC_CLK [adc]: IC8.12 U2.55
ADC_IN: IC8.19 IC11.2 IC11.3 IC11.9 IC11.10 TP1.1
ADC_NOE: IC8.1 R47.2 U2.59
ADCDR_HI: C17.2 IC6.8 IC11.11 R18.2
ADCDR_LO: C13.2 IC6.7 IC11.4 R14.2
AMPL_HI: IC2.15 R41.2 R42.2 TP53.1
AMPL_LO: IC2.14 R30.2 R31.2 TP52.1
ANT_HI: C35.1 C36.1 IC12.8 RLY1.8 SV2.4 TP3.1
ANT_LO: C20.1 C39.1 IC12.12 RLY1.3 SV2.2 TP2.1
BOOT0: IC2.60 R4.2
BOOT0_: JP4.7 R4.1
CROSS_HI: IC5.6 R44.1
CROSS_LO: IC5.7 R39.1
D/C: IC2.59 TP30.1 U3.15
D_N: IC2.44 R7.2
D_P: IC2.45 R8.2
DB2: SJ1.2 U3.20
DBG: TP7.1 U2.65
FPGA_CCLK: IC2.41 TP25.1 U2.52
FPGA_DIN: IC2.42 TP26.1 U2.48
FPGA_DONE: IC2.26 TP35.1 U2.51
FPGA_DOUT: IC2.43 TP27.1 U2.40
FPGA_NINIT: IC2.38 R59.1 TP45.1 U2.42
FPGA_NPROGRAM: IC2.23 TP24.1 U2.99
FPGA_ON: IC2.30 IC13.3 IC105.3 IC106.3 R23.2 R102.1 TP22.1
FPGA_TCK: SV5.4 U2.77
FPGA_TDI: SV5.2 U2.100
FPGA_TDO: SV5.3 U2.76
FPGA_TMS: SV5.1 U2.78
GND: BAT1.GND C1.2 C2.2 C3.2 C6.2 C7.2 C8.2 C9.1 C10.2 C11.2 C15.2 C18.2 C19.2 C20.2 C21.2 C22.2 C23.2 C24.2 C25.2 C26.2 C27.2 C28.2 C29.2 C30.2 C31.2 C32.2 C33.2 C34.2 C35.2 C36.2 C37.- C38.- C39.2 C44.2 C45.2 C46.2 C47.2 C48.2 C49.2 C50.2 C51.2 C52.2 C53.1 C54.1 C55.C C56.2 C57.2 C58.2 C59.2 C60.2 C61.2 C62.2 C63.2 C64.2 C206.2 C209.2 C210.2 C211.2 C212.2 D3.1 D6.1 D10.1 D11.1 IC1.4 IC1.9 IC1.P0 IC1.P1 IC1.P2 IC1.P3 IC1.P4 IC1.V0 IC1.V1 IC2.12 IC2.18 IC2.31 IC2.47 IC2.63 IC3.2 IC4.3 IC5.2 IC5.4 IC5.5 IC6.11 IC6.12 IC6.13 IC7.3 IC8.2 IC8.20 IC8.21 IC8.24 IC9.10 IC10.10 IC11.7 IC12.6 IC13.2 IC14.4 IC105.2 IC106.2 JP2.1 JP4.5 K1.1 K2.1 K3.1 LED3.C Q1.2 Q3.2 R3.1 R10.1 R11.1 R15.1 R23.1 R31.1 R42.1 R54.1 R60.1 R102.2 S1.1 SV1.5 SV1.TAB0 SV1.TAB1 SV1.TAB2 SV1.TAB3 SV5.5 U2.3 U2.10 U2.20 U2.29 U2.41 U2.56 U2.66 U2.73 U2.82 U2.95 U3.1 U3.8 U3.10 U3.11 U3.12 U3.29 U3.30 U4.6 U4.CD1 U4.CD2 U4.GND1 U4.GND3 U$7.4 U$7.5 U$7.9 U$7.V1 U$9.1 USB-MICRO.GND
JTAG_TCK: IC2.49 JP4.4
JTAG_TDI: IC2.50 JP4.2
JTAG_TDO: IC2.55 JP4.3
JTAG_TMS: IC2.46 JP4.1
JTRST: IC2.56 TP11.1
LED3: LED3.A R65.2
LED_A: IC2.54 R65.1 TP36.1
MISO: IC2.4 TP37.1 U2.15
MOSI: IC2.3 TP38.1 U2.14
MUXSEL_HIPKD: IC2.36 IC11.12 TP48.1
MUXSEL_HIRAW: IC2.34 IC11.6 TP50.1
MUXSEL_LOPKD: IC2.35 IC11.5 TP49.1
MUXSEL_LORAW: IC2.33 IC11.13 TP51.1
N$1: IC12.5
N$2: C53.2 IC2.5 Y1.P$1
N$3: IC4.4 R2.1
N$4: C2.1 IC4.2 R1.1 XT1.A
N$5: C4.1 U3.2
N$6: C57.1 LED2.C R24.1
N$8: R24.2 U$7.2
N$9: C4.2 U3.3
N$10: C5.1 U3.4
N$11: C5.2 U3.5
N$12 [power]: F1.1 U1.1
N$13: C8.1 U3.27
N$14: IC6.3 R9.1 R10.2
N$15: C17.1 IC6.9 R18.1 R19.2
N$16: C12.2 IC6.5 R12.2
N$17: C13.1 IC6.6 R13.2 R14.1
N$18: C16.1 R16.2
N$19: C11.1 C12.1 D1.3 D11.3 R11.2 R30.1
N$20: C14.2 D2.1 D3.3
N$21: C15.1 D2.3 D10.3 R15.2 R16.1 R41.1
N$22: C16.2 IC6.10 R17.2 R36.2 R37.2
N$23: IC5.1 R20.2
N$24: C18.1 IC8.23 R53.1 R54.2
N$25: C6.1 U3.28
N$26: IC5.3 R21.2
N$27: R39.2 U2.37
N$28: R3.2 U3.26
N$29: IC12.4
N$30: C9.2 D4.3 D5.3 IC2.1
N$31: R27.2 R29.2 R45.2 SV2.3 TP4.1
N$32: R22.2 R28.2 R46.2 SV2.1 TP5.1
N$33: IC9.12 IC9.14 IC9.16 IC9.18 R27.1
N$34: IC10.12 IC10.14 IC10.16 IC10.18 R28.1
N$35: D7.1 Q1.3 RLY1.10
N$36: C14.1 IC12.9 R21.1 RLY1.9
N$37: C42.1 IC12.7 RLY1.7
N$38: Q1.1 R40.2
N$39: D1.1 IC12.13 R20.1 RLY1.2
N$40: R44.2 U2.36
N$41: IC9.3 IC9.5 IC9.7 R22.1
N$42: IC10.3 IC10.5 IC10.7 R29.1
N$43: C41.2 IC11.1 IC14.7 R34.2
N$44: IC9.9 R45.1
N$45: IC10.9 R46.1
N$46: C43.1 IC12.11 RLY1.4
N$47: IC14.3 R35.2 R49.2
N$48: C19.1 IC8.17 R52.1 R53.2
N$50: C43.2 R32.1
N$51: C42.2 R35.1
N$52: C40.1 IC14.2 R33.1 R51.2
N$53: C41.1 IC14.6 R34.1 R50.2
N$54: IC14.5 R32.2 R48.2
N$55: C58.1 LED1.C R25.1
N$56: R37.1 R38.2
N$57: BAT1.PWR@1 D4.1
N$59: BUZ1.2 Q3.3
N$60: Q3.1 R319.1
N$61: IC2.6 R6.2
N$62: C54.2 R6.1 Y1.P$2
N$63: R25.2 U$7.3
N$64: R26.1 U$7.7
N$65: C60.1 R26.2 R43.2 U$7.6
N$66: C63.1 IC1.1
N$67: IC1.7 R55.1 R60.2
N$68: IC1.3 L2.P$2
N$69: IC7.1 R5.1
N$79: IC12.15
N$80: IC12.16
N$81: IC12.1
N$82: IC12.2
N$83: IC12.3
NCS: IC2.53 TP39.1 U2.39
NRST: C56.1 IC2.7 R5.2
NTC [power]: R43.1 TP16.1 U$9.2
NVDD_ON: IC2.29 R57.1 TP23.1
ONOFF: IC1.6 S1.2
PCK0: IC2.24 TP47.1 U2.88
PFETGATE: Q4.1 R56.1 R57.2
PS: IC1.8 JP2.2
PWR_HI: IC9.2 IC9.4 IC9.6 IC9.8 IC9.11 IC10.13 IC10.15 IC10.17 U2.61
PWR_LO: IC9.13 IC9.15 IC9.17 IC10.2 IC10.4 IC10.6 IC10.8 IC10.11 U2.62
PWR_OE1: IC2.39 IC9.1 TP44.1 U2.67
PWR_OE2: IC2.40 IC10.1 TP43.1 U2.68
PWR_OE3: IC2.51 IC9.19 TP42.1 U2.71
PWR_OE4: IC2.52 IC10.19 TP41.1 U2.72
RAW_HI: C40.2 IC11.8 IC14.1 R33.2
RELAY_ON: IC2.25 IC12.10 R40.1 TP46.1
RX: U2.43
SCLK/DB0: IC2.21 TP54.1 U3.18
SD_DI: IC2.11 R63.1 U4.3
SD_DO: IC2.10 R62.1 U4.7
SD_RSV: R61.1 U4.8
SD_SCK: IC2.9 U4.5
SDIN/DB1: IC2.22 SJ1.1 TP55.1 U3.19
SPCK: IC2.2 TP40.1 U2.87
SPEAKER: IC2.37 R319.2
SSP_CLK: IC2.28 TP33.1 U2.9
SSP_DIN: IC2.58 TP31.1 U2.8
SSP_DOUT: IC2.57 TP32.1 U2.5
SSP_FRAME: IC2.27 TP34.1 U2.4
SW_K1: IC2.20 K1.2 R71.1
SW_K2: IC2.17 K2.2 R70.1
SW_K3: IC2.16 K3.2 R69.1
TX: U2.44
UART_IO1: U2.47
UART_IO2: U2.21
USBD_N: D6.2 R7.1 SV1.2 USB-MICRO.D-
USBD_P: D6.4 R8.1 SV1.3 USB-MICRO.D+
VBAT+ [power]: C61.1 C62.1 IC1.5 JP2.3 L2.P$1 R55.2 S1.3 TP9.1 U$7.8 U$9.3
VBUS [power]: C1.1 C59.1 LED1.A LED2.A TP8.1 U1.2 U$7.1
VBUS_IN [power]: D6.3 F1.2 SV1.1 USB-MICRO.VBUS
VCC: BUZ1.1 C7.1 C25.1 C26.1 C27.1 C48.1 C49.1 C50.1 C51.1 D5.1 IC2.19 IC2.32 IC2.48 IC2.64 IC3.5 IC7.2 JP4.6 L1.1 R61.2 R62.2 R63.2 R64.2 R69.2 R70.2 R71.2 SV5.6 U3.6 U3.9 U4.4
VDD: C21.1 C22.1 C23.1 C24.1 C37.+ C38.+ C44.1 C46.1 D7.3 IC5.8 IC6.4 IC8.11 IC8.13 IC8.14 IC8.15 IC8.18 IC9.20 IC10.20 IC11.14 IC12.14 IC13.1 IC14.8 IC105.1 IC106.1 Q4.3 R9.2 R47.1 R52.2 R58.1 RLY1.1
VDDA: C52.1 C55.A IC2.13 L1.2
VMID: C10.1 C45.1 IC6.1 IC6.2 R12.1 R13.1 R17.1 R19.1 R36.1 R38.1 R48.1 R49.1 R50.1 R51.1

## Tracks (layer width: path | path; a pad name or v marks a point on that pad's centre or on a via)
5V  (via drill 0.3)
  Top 0.203: 80.01,44.91 78.74,44.91 R58.2 | 80.01,44.91 82.25,44.91 IC1.2 | 80.01,46.48 80.52,46.48 81.84,47.8 81.84,49.23 84.78,49.23 85.09,48.92 85.09,45.72 85.34,45.47 IC1.10 | 80.01,44.91 80.01,46.48 | Q4.2 75.29,44.2 75.34,44.25 75.34,45.72 R56.2 | R56.2 C64.1 73.51,45.77 73.51,49.53 | 73.51,49.53 IC3.3 | IC3.1 73.51,51.71 72.49,51.71 72.49,50.5 73.46,49.53 73.51,49.53 | R56.2 75.03,45.77 v75.03,46.74 75.08,46.53 79.96,46.53 80.01,46.48
  Bottom 0.203: TP10.1 73.91,46.74 v75.03,46.74
1356_CRYSTAL  (via drill 0.3)
  Top 0.203: R2.2 76.61,6.35 76.61,8.89 XT1.B 76.66,8.94 77.83,10.11 77.83,11.38 R1.2 77.93,11.43 77.93,12.85 | U2.89 51.31,5.13 51.77,5.13 U2.90 51.77,5.23 51.87,5.33 51.87,11.52 arc-45 v52.27,12.5 | 77.93,12.85 77.93,13.97 C3.1 | v77.88,12.85 77.93,12.85
  Bottom 0.203: v52.27,12.5 52.43,12.65 56.21,12.65 56.52,13.08 58.17,13.08 59.56,12.7 71.93,12.65 72.14,12.85 v77.88,12.85
!CS  (via drill 0.3)
  Top 0.203: v72.03,24.59 72.03,18.13 arc45 72.3,17.49 72.51,17.28 arc-45 72.64,16.96 72.64,15.85 IC2.62 | v55.73,48.11 56.44,47.4 56.44,36.22 v58.37,34.29
  Bottom 0.203: v72.03,24.59 74.17,26.72 arc-45 75.88,27.43 77.72,27.43 arc45 77.81,27.47 77.96,27.62 arc45 78.08,27.9 78.08,28.6 arc90 75.49,31.19 TP28.1 73.2,33.48 60.33,33.48 arc-45 v58.37,34.29 | v55.73,48.11 arc-90 54.15,49.68 54.15,50.85 U3.13
!RES  (via drill 0.3)
  Top 0.203: v72.08,16.79 72.08,15.85 IC2.61 | v79.4,28.09 79.19,28.3 arc-45 78.59,29.76 78.59,38.15 v79.76,39.32
  Bottom 0.203: v72.08,16.79 72.08,18.03 TP29.1 72.39,18.29 77.82,18.29 arc45 78.61,18.61 78.77,18.78 arc45 79.4,20.29 v79.4,28.09 | v79.76,39.32 79.76,54.15 56.34,54.15 54.86,52.68 54.86,50.9 U3.14
!SD_CS  (via drill 0.3)
  Top 0.203: v54.61,44.65 52.37,46.9 arc-45 51.87,48.1 51.87,50.9 U4.2 | R64.1 61.37,45.72 61.7,45.42 v61.7,44.7 61.75,44.02 61.75,43.87 64.82,40.79 64.77,34.29 64.77,27.53 arc90 65.33,26.97 65.73,26.57 65.73,22.61 v66.09,22.25 | v73.15,21.29 73.15,21.34 IC2.8
  Bottom 0.203: v61.7,44.7 61.01,44.65 v54.61,44.65 | v66.09,22.25 70.82,22.25 arc-45 v73.15,21.29
+1V2  (via drill 0.3)
  Top 0.203: 43.69,31.5 46.1,29.08 C211.1 | 43.69,31.5 41.61,33.57 arc-45 41.45,33.96 arc45 41.36,34.18 arc45 40.97,34.34 39.37,34.34 arc-90 38.91,34.8 38.91,35.79 arc56 38.38,36.78 36.68,37.9 arc-56 35.15,40.75 35.15,42.58 arc45 34.33,44.56 34.14,44.76 IC106.5 34.04,44.76 arc-90 33.73,44.45 | 33.73,44.45 33.88,44.45 | 33.73,44.45 C206.1 | 39.37,9.7 C212.1 | C212.1 39.32,9.8 39.32,10.16 TP20.1 C210.1 | 39.52,9.65 C212.1 | v62.43,7.37 62.43,6.55 62.64,6.35 C209.1 | v53.29,7.01 53.29,5.13 U2.93 | 47.4,19 47.4,13.11 v48.46,12.04 | 47.4,19 47.4,20.22 47.35,20.27 U2.45 | v44.5,9.75 43.28,9.75 U2.69 39.41,9.7 C212.1 | v42.14,19.23 42.27,28.49 arc-51 43.69,31.5 | v47.35,19 47.4,19 | v56.59,9.8 arc90 56.52,9.86 56.52,12.95 56.9,13.33 56.9,14.99 arc-90 57.1,15.19 58.37,15.19 58.38,15.2 U2.18
  Bottom 0.203: 53.75,7.01 61.57,7.01 arc45 v62.43,7.37 | v53.29,7.01 53.75,7.01 | v56.59,9.8 54.1,9.8 53.75,9.45 | 53.75,7.01 53.75,9.45 | 50.55,9.96 51,9.5 53.7,9.5 53.75,9.45 | 50.55,9.96 v48.46,12.04 | v44.5,9.75 44.65,9.91 50.49,9.91 50.55,9.96 | v42.14,19.23 arc45 42.76,19.15 47.19,19.15 v47.35,19
+2V5  (via drill 0.3)
  Top 0.203: v46.74,35.41 arc45 47.02,34.71 48.26,33.48 C31.1 | C33.1 26.87,46.99 arc-90 27.74,46.13 IC105.5 arc45 27.38,45.08 v27.38,44.91 | C30.1 62.94,8.89 v62.94,9.09 | v59.74,9.65 58.42,9.65 U2.7 | v41.91,15.19 43.18,15.19 U2.58 | v40.79,15.09 40.69,14.99 39.42,14.43 TP19.1 C29.1 39.32,14.48 38.56,15.24 38.56,22.13 arc-45 v38.96,23.11 | 50.8,10.52 50.38,10.09 arc45 48.87,6.45 48.87,5.18 48.82,5.13 U2.84 | 50.95,14.43 50.95,10.88 arc-45 50.8,10.52 | 50.95,14.43 50.95,14.48 52.55,16.08 arc45 53.29,17.85 53.29,20.27 U2.33 | v50.9,14.43 50.95,14.43 | 50.8,10.52 v50.95,10.36 | 48.21,33.38 C31.1 | v48.01,25.55 48.01,27.69 48.26,27.94 C31.1
  Bottom 0.203: v46.74,35.41 42.16,39.98 arc45 37.88,41.76 31.8,41.76 v27.38,44.91 | v62.94,9.09 arc45 61.59,9.65 v59.74,9.65 59.73,9.66 arc45 58.04,10.36 v50.95,10.36 | v40.79,15.09 41.81,15.09 v41.91,15.19 arc45 42.65,14.88 45.02,14.88 arc-45 46.13,14.43 v50.9,14.43 | v48.01,25.55 arc-45 45.55,24.54 42.4,24.54 arc45 v38.96,23.11
+3V3-FPGA  (via drill 0.3)
  Top 0.203: C34.1 30.48,42.11 31.7,42.11 34.09,39.73 IC13.5 34.19,39.62 arc-45 34.54,38.77 v34.54,32.77 | v44.5,16.31 44.5,15.75 43.23,15.75 U2.57 | v43.89,29.11 43.64,28.6 43.64,27.01 arc45 43.88,26.43 44.4,25.91 C32.1 44.79,25.48 arc-62 45.09,24.29 C28.1 R59.2 47.4,24.13 47.19,23.93 47.19,21.58 arc-45 47.13,21.42 46.84,21.13 46.84,20.32 U2.46 46.74,20.22 v46.74,16.36 46.74,6.96 | U2.31 54.3,20.27 54.3,19.14 arc-45 54.03,18.47 arc45 53.75,17.92 53.75,15.75 53.7,14.02 v53.7,13.72 53.7,9.91 arc45 53.75,9.67 53.75,8.61 arc45 54.08,7.79 v54.3,7.57 v54.3,7.57 arc45 53.85,6.47 53.85,5.18 U2.94 53.8,5.08 53.7,4.98 53.7,4.17 53.19,3.66 51.31,3.66 51.31,3.56 51,3.25 50.39,3.25 49.63,4.01 48.3,4.01 U2.83 48.3,6.96 46.74,6.96 | U2.19 58.37,15.75 56.9,15.75 arc90 v55.63,14.22 | IC4.5 C47.1 78.23,3.86 v77.11,4.85 | 41.35,6.3 41.35,8.74 42.32,9.2 43.18,9.2 U2.70 | 46.74,6.96 44.3,6.96 44.3,6.5 44.09,6.3 41.35,6.3 | 58.42,9.2 U2.6 59.13,9.2 arc-90 59.69,8.64 v59.69,7.93 59.69,7.87 59.74,7.87 59.74,6.25 v61.01,4.98 | TP18.1 41.3,6.35 41.35,6.3
  Bottom 0.203: v44.5,16.31 44.55,16.36 v46.74,16.36 | v43.89,29.11 42.42,29.95 arc30 41.76,30.12 37.41,30.12 arc-45 37.03,30.28 v34.54,32.77 | v54.3,7.57 58.83,7.57 arc45 v59.69,7.93 | v61.01,4.98 61.72,4.98 61.72,5.08 73.91,5.08 73.91,4.83 v77.11,4.85 | v55.63,14.22 v53.7,13.72
ADC1
  Top 0.203: U2.35 52.3,21.82 52.98,22.5 IC8.3
ADC2
  Top 0.203: IC8.4 53.63,22.65 52.8,21.81 U2.34
ADC3
  Top 0.203: U2.32 53.8,21.8 54.28,22.28 IC8.5
ADC4
  Top 0.203: U2.30 54.8,22.03 54.93,22.17 IC8.6
ADC5
  Top 0.203: U2.28 55.8,21.67 55.59,21.88 IC8.7
ADC6
  Top 0.203: IC8.8 56.23,22.61 56.3,22.54 U2.27
ADC7
  Top 0.203: IC8.9 56.9,23.47 56.9,22.1 57.4,21.59 57.4,19.3 57.15,19.05 57.15,18.03 57.48,17.7 U2.23
ADC8
  Top 0.203: IC8.10 57.53,22.22 57.91,21.84 57.91,20.83 59.56,18.92 arc-45 59.69,18.69 59.69,17.74 arc-45 59.54,17.38 59.52,17.36 arc-45 59.14,17.2 U2.22
ADC_CLK  (via drill 0.3)
  Top 0.203: v44.3,21.39 44.3,16.97 44.04,16.71 43.23,16.71 U2.55 | IC8.12 58.84,21.39 v58.62,21.39
  Bottom 0.203: v44.3,21.39 v58.62,21.39
ADC_IN  (via drill 0.3)
  Top 0.203: v55.73,27.99 54.97,28.75 54.97,29.82 IC8.19 | IC11.2 IC11.3 33.12,19.1 v33.12,23.98 | v34.24,24.03 34.34,24.13 34.34,25.04 IC11.10 34.39,25.15 34.95,25.15 IC11.9 34.95,25.25 34.95,26.81 arc-45 35.17,27.35 v35.76,27.94
  Bottom 0.203: v55.73,27.99 54.66,27.99 TP1.1 v35.76,27.94 | v33.12,23.98 33.17,24.03 v34.24,24.03
ADC_NOE  (via drill 0.3)
  Top 0.203: IC8.1 51.66,23.52 51.66,24.85 arc90 50.71,25.81 49.53,25.81 R47.2 49.48,25.86 v48.67,26.67 | v45.06,18.59 45.06,14.73 43.23,14.73 U2.59 | v40.84,19.18 40.89,19.48 40.89,24.71 arc-45 v41.58,26.67
  Bottom 0.203: v45.06,18.59 44.86,18.67 41.4,18.67 40.89,19.18 v40.84,19.18 | v48.67,26.67 v41.58,26.67
ADCDR_HI  (via drill 0.3)
  Top 0.203: C17.2 34.29,16.1 31.75,16.1 R18.2 31.7,16 31.7,15.34 v30.78,15.34 | v29.31,15.14 29.31,16.21 IC6.8 | v33.68,20.17 33.68,25.09 IC11.11
  Bottom 0.203: v29.31,15.14 arc-45 29.8,15.34 v30.78,15.34 30.84,15.39 30.84,16.52 arc-45 31.4,17.89 v33.68,20.17
ADCDR_LO  (via drill 0.3)
  Top 0.203: 32.66,5.03 C13.2 32.61,5.08 32.61,7.62 R14.2 32.51,7.67 32.51,8.43 arc-45 30,9.47 29.31,10.16 IC6.7 29.55,10.41 v30.23,10.41 | IC11.4 33.7,18.37 35.56,17.02 v35.56,13.46
  Bottom 0.203: v35.56,13.46 arc45 31.66,11.85 v30.23,10.41
AMPL_HI  (via drill 0.3)
  Top 0.203: R42.2 24.13,23.72 21.59,23.72 R41.2 21.54,23.77 20.9,24.42 arc-45 19.96,26.67 v19.96,27.13 | v77.52,27.99 77.52,25.45 TP53.1 76.91,24.84 IC2.15
  Bottom 0.203: v19.96,27.13 18.29,28.8 18.29,33.33 57.13,33.33 arc-45 59.33,32.41 59.48,32.26 arc45 61.95,31.24 71.97,31.24 arc-45 75.9,29.62 v77.52,27.99
AMPL_LO
  Top 0.203: IC2.14 75.64,24.33 77.27,24.33 arc-90 77.72,23.88 TP52.1 77.47,16.44 arc45 77.89,15.43 78.63,14.69 arc-45 78.79,14.3 78.79,9.67 arc45 79.78,7.65 81.1,6.84 arc-45 81.38,6.15 81.38,3.38 arc-45 80.9,2.46 80.42,1.99 arc-45 77.09,0.97 30.02,0.97 30.02,2.34 29.77,2.59 27.69,2.59 27.69,3.15 26.31,4.52 23.27,4.52 23.22,4.57 | 23.22,4.57 22.45,3.81 R30.2 | 23.22,4.57 23.22,10.21 22.86,10.57 R31.2
ANT_HI  (via drill 0.3)
  Top 0.203: 7.62,4.32 RLY1.8 7.62,7.41 | 4.57,7.37 IC12.8 7.62,7.41 | v8.33,23.57 7.37,23.57 arc-90 6.76,24.18 SV2.4 6.66,24.23 6.21,24.23 arc-45 4.2,25.06 2.81,26.45 arc-45 2.29,27.72 2.29,33.27 TP3.1 | C35.1 9.91,28.19 arc90 v9.96,28.14 9.96,27.06 arc-90 C36.1 | v8.64,8.53 8.64,7.41 7.62,7.41
  Bottom 0.203: v9.96,28.14 9.07,24.17 arc-77 v8.33,23.57 8.03,23.27 arc90 4.22,19.46 4.22,9.76 arc90 5.44,8.53 v8.64,8.53
ANT_LO
  Top 0.203: IC12.12 5.33,9.65 5.33,11.46 arc45 5.25,11.67 arc45 4.72,11.89 4.32,11.89 4.32,15.24 arc90 4.06,15.49 3.81,15.49 | RLY1.3 7.62,13.72 6.51,14.82 arc-45 6.17,15.64 arc90 5.3,16.51 4.83,16.51 arc90 3.81,15.49 | 8.89,25.76 6.76,25.76 SV2.2 | 8.89,25.76 TP2.1 8.84,21.54 arc-90 7.42,20.12 3.61,20.12 arc90 2.54,19.05 2.54,18.2 arc-90 C39.1 1.27,16.76 arc90 2.54,15.49 3.81,15.49 | C20.1 8.89,25.76
BOOT0
  Top 0.203: IC2.60 71.63,15.8 71.63,15.19 71.75,15.06 arc-45 71.83,14.88 71.83,10.63 R4.2
BOOT0_
  Top 0.203: JP4.7 arc-90 73.81,1.42 72.43,1.42 arc-45 71.58,1.78 arc-45 71.17,2.76 71.17,9.04 71.88,9.04 R4.1
CROSS_HI  (via drill 0.3)
  Top 0.203: v36.47,28.7 38.51,26.67 R44.1 | v18.85,29.06 18.43,28.64 arc45 18.14,27.93 18.14,27.08 IC5.6
  Bottom 0.203: v36.47,28.7 36.12,29.06 v18.85,29.06
CROSS_LO  (via drill 0.3)
  Top 0.203: v32.92,33.88 arc90 34.34,32.21 35.87,32.21 arc-45 37.34,31.6 arc-45 37.49,31.23 37.49,31.01 arc45 38.05,29.67 38.51,29.21 R39.1 | v17.58,28.45 17.48,28.35 17.48,27.08 IC5.7
  Bottom 0.203: v32.92,33.88 32.46,33.68 18.14,33.68 17.58,33.12 v17.58,28.45
D/C  (via drill 0.3)
  Top 0.203: TP30.1 71.12,14.22 | 71.12,14.22 71.12,15.8 IC2.59 | v71.27,14.22 71.12,14.22
  Bottom 0.203: v71.27,14.22 73.55,14.22 arc45 75.99,15.24 82.22,21.46 arc-45 83.63,22.05 86.84,22.05 arc45 87.76,22.43 89.31,23.98 89.31,26.55 arc90 88.57,27.28 82.3,27.28 80.73,28.85 arc-45 79.2,32.54 79.2,45.01 72.64,45.01 66.5,51.16 66.5,53.8 56.69,53.8 55.57,52.68 55.57,50.9 U3.15
D_N  (via drill 0.3)
  Top 0.203: v78.28,25.81 79.15,26.67 R7.2 | v67.46,22.81 65.73,21.08 65.73,20.73 64.87,19.86 64.11,19.86 IC2.44
  Bottom 0.203: v78.28,25.81 76.1,23.63 arc-45 73.89,22.71 67.56,22.71 v67.46,22.81
D_P  (via drill 0.3)
  Top 0.203: v78.28,23.27 79.15,24.13 R8.2 | v66.29,20.73 64.92,19.36 64.11,19.36 IC2.45
  Bottom 0.203: v66.29,20.73 73.53,20.73 arc45 77.67,22.65 v78.28,23.27
DB2  (via drill 0.3)
  Top 0.203: v59.18,48.46 v59.18,46.99
  Bottom 0.203: v59.18,46.99 SJ1.2 | v59.18,48.46 59.18,50.85 59.08,50.85 U3.20
DBG  (via drill 0.3)
  Top 0.203: v44.5,11.68 43.23,11.68 U2.65
  Bottom 0.203: TP7.1 45.11,11.43 arc-45 v44.5,11.68
FPGA_CCLK  (via drill 0.3)
  Top 0.203: v60.5,20.83 arc-90 61.01,21.34 61.52,21.34 IC2.41 | U2.52 42.1,18.2 arc-90 41.58,18.6 v41.58,20.83 41.66,20.83 TP25.1
  Bottom 0.203: v41.58,20.83 v60.5,20.83
FPGA_DIN  (via drill 0.3)
  Top 0.203: v65.18,20.98 65.18,20.88 64.11,20.88 IC2.42 | v45.87,21.95 45.82,21.13 45.82,20.32 U2.48 45.82,20.22 v45.82,18.59
  Bottom 0.203: v45.87,21.95 63.6,21.95 arc-45 64.64,21.51 v65.18,20.98 | TP26.1 45.72,18.59 v45.82,18.59
FPGA_DONE  (via drill 0.3)
  Top 0.203: v69.09,26.26 69.09,27.33 IC2.26 | v46.23,23.11 43.98,22.18 arc67 43.18,20.98 TP35.1 43.23,20.27 43.23,18.75 U2.51
  Bottom 0.203: v69.09,26.26 68.26,25.44 arc-45 65.22,24.18 47.35,24.18 arc87 v46.23,23.11
FPGA_DOUT  (via drill 0.3)
  Top 0.203: v49.73,17.98 49.78,19.05 49.78,20.27 U2.40 49.84,20.37 49.84,22.15 50.55,22.86 50.55,23.52 arc-45 TP27.1 | IC2.43 64.06,20.32 63.37,20.32 63.12,20.57 61.28,20.57 60.4,19.7 v60.4,19.36
  Bottom 0.203: v49.73,17.98 57.95,17.98 arc62 60.1,19.27 v60.4,19.36
FPGA_NINIT  (via drill 0.3)
  Top 0.203: IC2.38 64.06,22.86 TP45.1 60.35,22.99 v60.35,23.62 | 48.82,23.27 48.82,20.32 U2.42 | 48.82,23.27 48.82,23.88 49.07,24.13 R59.1 | 48.82,23.27 v49.99,23.27
  Bottom 0.203: v49.99,23.27 50.14,23.42 60.15,23.42 v60.35,23.62
FPGA_NPROGRAM  (via drill 0.3)
  Top 0.203: v70.36,20.17 70.36,24.23 70.51,24.38 70.6,24.47 IC2.23 | v56.29,14.68 56.01,12.7 56.01,9.53 56.29,9.25 56.29,5.13 U2.99 56.34,5.03 56.34,3.35 TP24.1 | v60.25,15.04 60.25,16.56 60.96,17.4 60.96,18.92 61.72,19.3 62.05,19.3 v61.95,19.28
  Bottom 0.203: v70.36,20.17 69.12,19.67 arc-22 68.15,19.43 64.9,19.43 arc19 63.81,19.36 v61.95,19.28 | v56.29,14.68 59.9,14.68 arc45 v60.25,15.04
FPGA_ON  (via drill 0.3)
  Top 0.203: TP22.1 36.98,48.11 IC106.3 37,46.66 37.55,46.66 arc-90 38.63,45.58 38.63,44.56 arc-58 IC13.3 | IC105.3 36.93,47.96 TP22.1 | R102.1 R23.2 | v66.6,39.22 66.6,35.02 arc45 66.97,34.12 arc-45 67.11,33.8 67.11,27.38 IC2.30 | 40.69,47.75 R23.2 | TP22.1 37.03,48.16 40.59,48.16 R23.2 | v46.33,40.34 arc45 44.57,44.59 41.4,47.75 40.73,47.75 R23.2
  Bottom 0.203: v46.33,40.34 64.98,40.34 arc-45 65.83,39.98 v66.6,39.22
FPGA_TCK  (via drill 0.3)
  Top 0.203: 45.21,6.25 v45.06,6.4 45.26,6.4 45.26,5.13 45.31,5.11 U2.77
  Bottom 0.203: SV5.4 49.53,5.08 49.51,5.1 U2.77 45.06,5.34 v45.06,6.4
FPGA_TDI  (via drill 0.3)
  Top 0.203: v57.76,1.52 57.76,4.17 56.84,5.08 U2.100
  Bottom 0.203: v57.76,1.52 57.66,1.42 45.57,1.42 SV5.2
FPGA_TDO  (via drill 0.3)
  Top 0.203: 44.91,4.01 v45.16,3.76 44.81,3.76 44.81,5.08 U2.76
  Bottom 0.203: v45.16,3.76 46.38,2.54 SV5.3
FPGA_TMS
  Top 0.203: SV5.1 41.91,1.42 44.91,1.42 45.72,2.23 arc90 45.8,2.31 U2.78
GND  (via drill 0.3)